# EAGLE board PCB v7 (EAGLE 9.7.0)
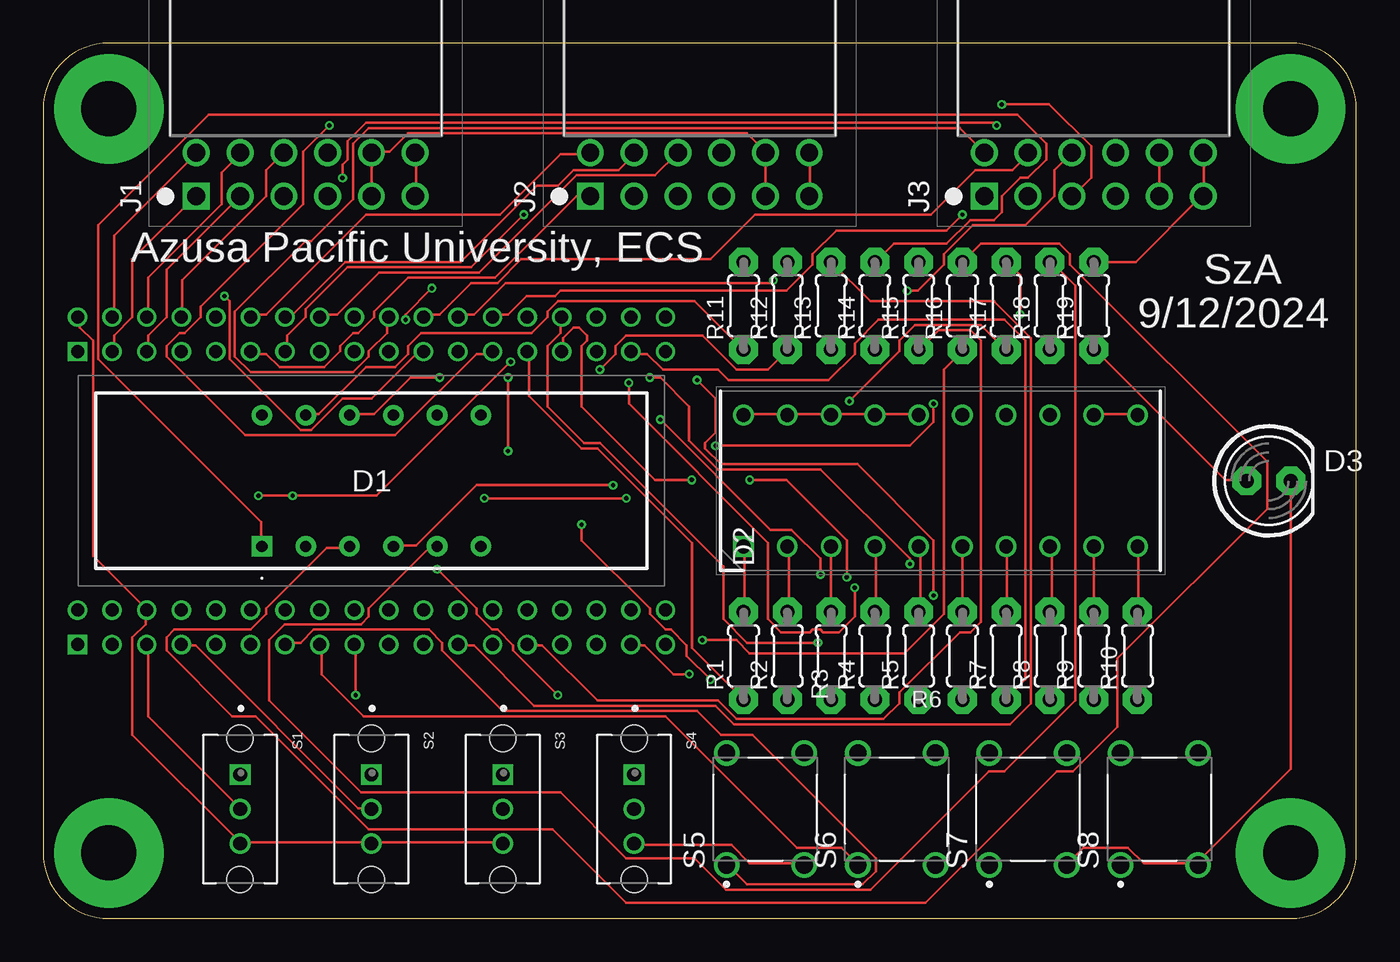
[diagram p0: board, top side]
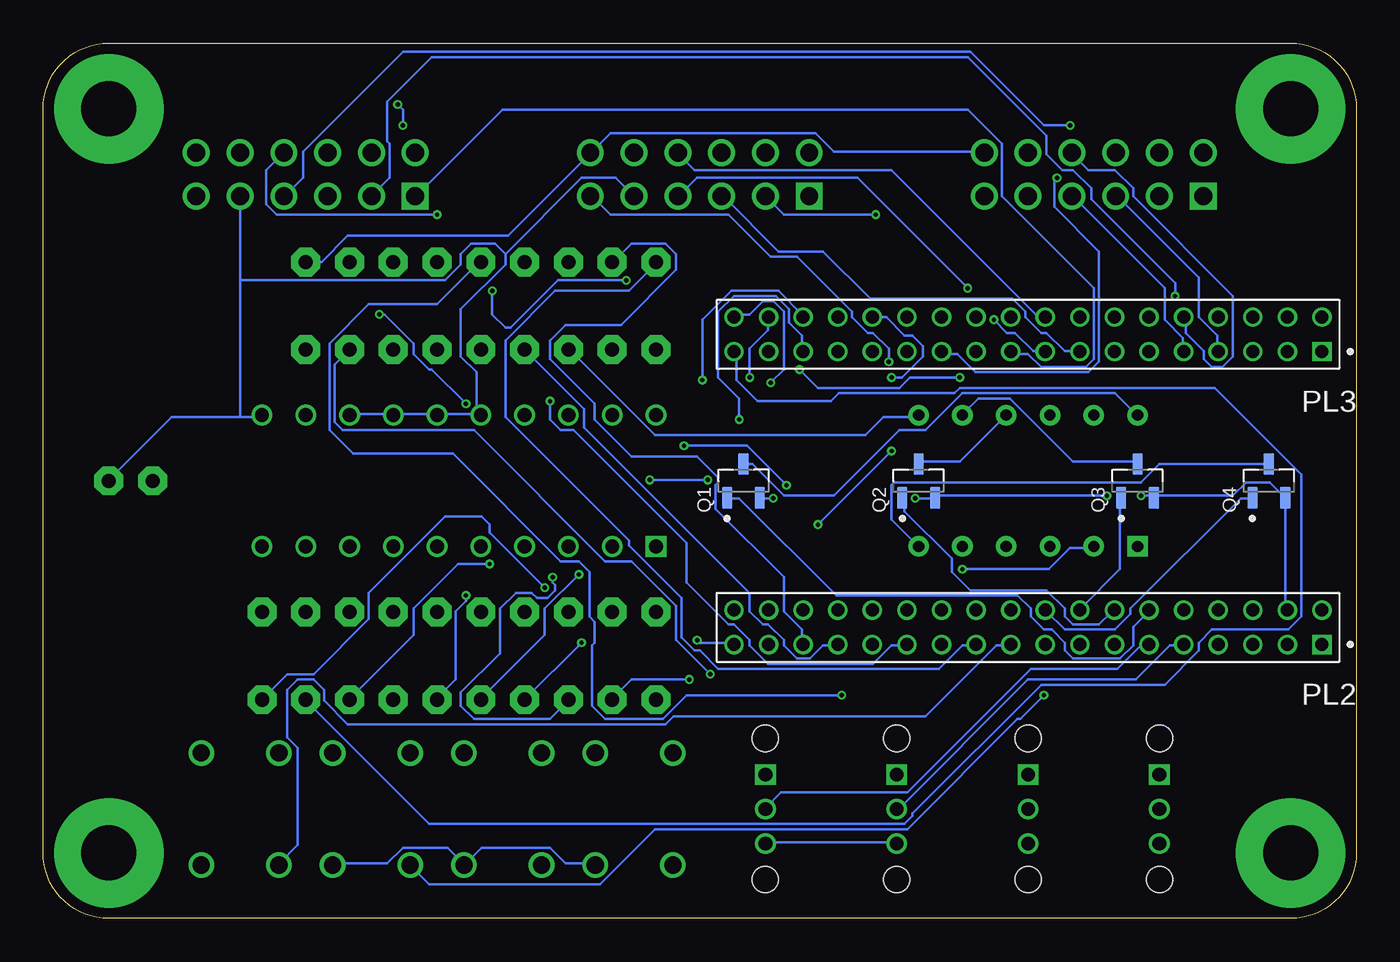
[diagram p1: board, bottom side, seen from below]

Size 76.2 x 50.8 mm. Coordinates in mm from the lower left corner, seen from the top.
Outline: 0,46.99 0,3.81 arc90 3.81,0 72.39,0 arc90 76.2,3.81 76.2,46.99 arc90 72.39,50.8 3.81,50.8 arc90 0,46.99
Copper layers (1*16): Top / Bottom
Stack-up Default Layer Stack: Top User Defined 0.035559375mm / Dielectric-1 User Defined 1.6mm / Bottom User Defined 0.035559375mm
Design rules: minimum drill size 10mil, minimum copper width 6mil, keepout clearance 0mil, drill distance 6mil, via restrict clearance 0mil, dimension clearance 15mil, restrict clearance 0mil, copper clearance wire_polygon to wire_polygon 6mil, copper clearance wire_polygon to pad_smd 6mil, copper clearance wire_polygon to via 6mil, copper clearance pad_smd to pad_smd 6mil, copper clearance pad_smd to via 6mil, copper clearance via to via 6mil, copper clearance smd to pad (same net) 6mil, copper clearance smd to via (same net) 6mil, copper clearance smd to smd (same net) 6mil

## Footprints (pad centres in the part's own frame; a part is rotated, then mirrored left to right if it is on the bottom)
LDQM282RI = drill 0.65 pad 1.192 square: 1 0,0 | drill 0.65 pad 1.192: 2 2.54,0; 3 5.08,0; 4 7.62,0; 5 10.16,0; 6 12.7,0; 7 12.7,7.62; 8 10.16,7.62; 9 7.62,7.62; 10 5.08,7.62; 11 2.54,7.62; 12 0,7.62
DIPS762W50P254L2527H825Q20N = drill 0.8 pad 1.2 square: 1 0,0 | drill 0.8 pad 1.2: 2 0,-2.54; 3 0,-5.08; 4 0,-7.62; 5 0,-10.16; 6 0,-12.7; 7 0,-15.24; 8 0,-17.78; 9 0,-20.32; 10 0,-22.86; 11 7.62,-22.86; 12 7.62,-20.32; 13 7.62,-17.78; 14 7.62,-15.24; 15 7.62,-12.7; 16 7.62,-10.16; 17 7.62,-7.62; 18 7.62,-5.08; 19 7.62,-2.54; 20 7.62,0
LED5MM = drill 0.813 pad 1.676 octagon: A -1.27,0; K 1.27,0
PMOD-SOCKET-FOR-HOST-BOARD = drill 1.04 pad 1.55 square: 1 0,0 | drill 1.04 pad 1.55: 2 2.54,0; 3 5.08,0; 4 7.62,0; 5 10.16,0; 6 12.7,0; 7 0,2.54; 8 2.54,2.54; 9 5.08,2.54; 10 7.62,2.54; 11 10.16,2.54; 12 12.7,2.54
MT_125_250 = drill 3.175 pad 6.35: 1 0,0
TE_4-1734506-1 = drill 0.75 pad 1.1 square: 1 0,0 | drill 0.75 pad 1.1: 2 0,-2; 3 2.007,0; 4 2.007,-2; 5 4.013,0; 6 4.013,-2; 7 6.02,0; 8 6.02,-2; 9 8.026,0; 10 8.026,-2; 11 10.033,0; 12 10.033,-2; 13 12.04,0; 14 12.04,-2; 15 14.046,0; 16 14.046,-2; 17 16.053,0; 18 16.053,-2; 19 18.059,0; 20 18.059,-2; 21 20.066,0; 22 20.066,-2; 23 22.073,0; 24 22.073,-2; 25 24.079,0; 26 24.079,-2; 27 26.086,0; 28 26.086,-2; 29 28.092,0; 30 28.092,-2; 31 30.099,0; 32 30.099,-2; 33 32.106,0; 34 32.106,-2; 35 34.112,0; 36 34.112,-2
SOT95P230X110-3N = smd 1.26 x 0.59: 1 -0.98,0.95; 2 -0.98,-0.95; 3 0.98,0
0204/5 = drill 0.813 pad 1.676 octagon: 1 -2.54,0; 2 2.54,0
SW_OS102011MS2QN1 = drill 0.8 square: 1 -2,0 | drill 0.8: 2 0,0; 3 2,0 | hole 1.5: -4.1,0; 4.1,0
SW_1825910-7 = drill 0.99: 1 -3.25,2.25; 2 3.25,2.25; 3 -3.25,-2.25; 4 3.25,-2.25

## Placement (x,y rotation side)
D1  [LDQM282RI]  12.7,21.59 0 top
D2  [DIPS762W50P254L2527H825Q20N]  40.64,21.59 90 top
D3  [LED5MM]  71.12,25.4 0 top
J1  [PMOD-SOCKET-FOR-HOST-BOARD]  8.89,41.91 0 top
J2  [PMOD-SOCKET-FOR-HOST-BOARD]  31.75,41.91 0 top
J3  [PMOD-SOCKET-FOR-HOST-BOARD]  54.61,41.91 0 top
MT1  [MT_125_250]  3.81,46.99 0 top
MT2  [MT_125_250]  3.81,3.81 0 top
MT3  [MT_125_250]  72.39,46.99 0 top
MT4  [MT_125_250]  72.39,3.81 0 top
PL2  [TE_4-1734506-1]  2,15.9 180 bottom
PL3  [TE_4-1734506-1]  2,32.9 180 bottom
Q1  [SOT95P230X110-3N]  35.56,25.4 90 bottom
Q2  [SOT95P230X110-3N]  25.4,25.4 90 bottom
Q3  [SOT95P230X110-3N]  12.7,25.4 90 bottom
Q4  [SOT95P230X110-3N]  5.08,25.4 90 bottom
R1  [0204/5]  40.64,15.24 90 top
R2  [0204/5]  43.18,15.24 90 top
R3  [0204/5]  45.72,15.24 90 top
R4  [0204/5]  48.26,15.24 90 top
R5  [0204/5]  50.8,15.24 90 top
R6  [0204/5]  53.34,15.24 90 top
R7  [0204/5]  55.88,15.24 90 top
R8  [0204/5]  58.42,15.24 90 top
R9  [0204/5]  60.96,15.24 90 top
R10  [0204/5]  63.5,15.24 90 top
R11  [0204/5]  40.64,35.56 90 top
R12  [0204/5]  43.18,35.56 90 top
R13  [0204/5]  45.72,35.56 90 top
R14  [0204/5]  48.26,35.56 90 top
R15  [0204/5]  50.8,35.56 90 top
R16  [0204/5]  53.34,35.56 90 top
R17  [0204/5]  55.88,35.56 90 top
R18  [0204/5]  58.42,35.56 90 top
R19  [0204/5]  60.96,35.56 90 top
S1  [SW_OS102011MS2QN1]  11.43,6.35 270 top
S2  [SW_OS102011MS2QN1]  19.05,6.35 270 top
S3  [SW_OS102011MS2QN1]  26.67,6.35 270 top
S4  [SW_OS102011MS2QN1]  34.29,6.35 270 top
S5  [SW_1825910-7]  41.91,6.35 90 top
S6  [SW_1825910-7]  49.53,6.35 90 top
S7  [SW_1825910-7]  57.15,6.35 90 top
S8  [SW_1825910-7]  64.77,6.35 90 top

## Library data of the parts
D1 = eagle-library-engr-240-f24; DESCRIPTION: LED Displays & Accessories LED Display; HEIGHT: 6.05mm; MANUFACTURER_NAME: Lumex; MANUFACTURER_PART_NUMBER: LDQ-M282RI; MOUSER_PART_NUMBER: 696-LDQ-M282RI; MOUSER_PRICE-STOCK: https://www.mouser.com/Search/Refine.aspx?Keyword=696-LDQ-M282RI
D2 = eagle-library-engr-240-f24; DESCRIPTION: LED Uni-Color Green 565nm 20-Pin PDIP; HEIGHT: 8.25mm; MANUFACTURER_NAME: Lite-On; MANUFACTURER_PART_NUMBER: LTA-1000G; MOUSER_PART_NUMBER: 859-LTA-1000G; MOUSER_PRICE-STOCK: https://www.mouser.co.uk/ProductDetail/Lite-On/LTA-1000G?qs=%2FTKcI5XXRKq0QINzVmwJHg%3D%3D
D3 J1-J3 MT1-MT4 PL2 PL3 R1-R19 = eagle-library-engr-240-f24
Q1-Q4 = eagle-library-engr-240-f24; MANUFACTURER: Nexperia; MAXIMUM_PACKAGE_HEIGHT: 1.10 mm; PARTREV: 1; SNAPEDA_PN: NX2301P; STANDARD: IPC 7351B
S1-S4 = eagle-library-engr-240-f24; MANUFACTURER: C&K; STANDARD: MANUFACTURER RECOMMENDATIONS
S5-S8 = eagle-library-engr-240-f24; MANUFACTURER: TE Connectivity; PARTREV: C10; STANDARD: Manufacturer Recommendation

## Nets
3.3V: J1.6 J1.12 J2.6 J2.12 J3.6 J3.12 PL2.4 Q1.2 Q2.2 Q3.2 Q4.2 R19.2
BAR_1: PL3.27 R1.1
BAR_2: PL3.28 R2.1
BAR_3: PL3.29 R3.1
BAR_4: PL3.30 R4.1
BAR_5: PL3.31 R5.1
BAR_6: PL3.32 R6.1
BAR_7: PL3.33 R7.1
BAR_8: PL3.34 R8.1
BAR_9: PL3.35 R9.1
BAR_10: PL3.36 R10.1
BUTTON_1: PL2.13 S5.1
BUTTON_2: PL2.15 S6.1
BUTTON_3: PL2.17 S7.1
BUTTON_4: PL2.19 S8.1
DIGIT_1: PL2.12 Q1.1
DIGIT_1_A: D1.12 Q1.3
DIGIT_2: PL2.14 Q2.1
DIGIT_2_A: D1.9 Q2.3
DIGIT_3: PL2.16 Q3.1
DIGIT_3_A: D1.8 Q3.3
DIGIT_4: PL2.18 Q4.1
DIGIT_4_A: D1.6 Q4.3
GND: D2.11 D2.12 D2.13 D2.14 D2.15 D2.16 D2.17 D2.18 D2.19 D2.20 D3.K J1.5 J1.11 J2.5 J2.11 J3.5 J3.11 PL2.6 PL3.2 S1.3 S2.3 S3.3 S4.3 S5.3 S6.3 S7.3 S8.3
N$2: D1.1 R14.2
N$3: D1.2 R15.2
N$4: D1.3 R16.2
N$5: D1.4 R17.2
N$6: D1.5 R18.2
N$7: D2.1 R1.2
N$8: D2.2 R2.2
N$9: D2.3 R3.2
N$10: D2.4 R4.2
N$11: D2.5 R5.2
N$12: D2.6 R6.2
N$13: D2.7 R7.2
N$14: D2.8 R8.2
N$15: D2.9 R9.2
N$16: D2.10 R10.2
N$17: D3.A R19.1
N$52: D1.11 R11.1
N$53: D1.10 R12.1
N$54: D1.7 R13.1
PMOD_1_1: J1.1 PL3.3
PMOD_1_2: J1.2 PL3.5
PMOD_1_3: J1.3 PL3.7
PMOD_1_4: J1.4 PL3.9
PMOD_1_5: J1.7 PL3.4
PMOD_1_6: J1.8 PL3.6
PMOD_1_7: J1.9 PL3.8
PMOD_1_8: J1.10 PL3.10
PMOD_2_1: J2.1 PL3.11
PMOD_2_2: J2.2 PL3.13
PMOD_2_3: J2.3 PL3.15
PMOD_2_4: J2.4 PL3.17
PMOD_2_5: J2.7 PL3.12
PMOD_2_6: J2.8 PL3.14
PMOD_2_7: J2.9 PL3.16
PMOD_2_8: J2.10 PL3.18
PMOD_3_1: J3.1 PL3.19
PMOD_3_2: J3.2 PL3.21
PMOD_3_3: J3.3 PL3.23
PMOD_3_4: J3.4 PL3.25
PMOD_3_5: J3.7 PL3.20
PMOD_3_6: J3.8 PL3.22
PMOD_3_7: J3.9 PL3.24
PMOD_3_8: J3.10 PL3.26
SEGMENT_A: PL2.21 R11.2
SEGMENT_B: PL2.23 R13.2
SEGMENT_C: PL2.25 R17.1
SEGMENT_D: PL2.27 R15.1
SEGMENT_DP: PL2.35 R16.1
SEGMENT_E: PL2.29 R14.1
SEGMENT_F: PL2.31 R12.2
SEGMENT_G: PL2.33 R18.1
SWITCH_1: PL2.5 S1.2
SWITCH_2: PL2.7 S2.2
SWITCH_3: PL2.9 S3.2
SWITCH_4: PL2.11 S4.2

## Tracks (layer width: path | path; a pad name or v marks a point on that pad's centre or on a via)
3.3V  (via drill 0.25)
  Top 0.152: v33.83,24.38 v25.6,24.38 | v12.5,24.54 v14.48,24.54 19.36,24.54 v27.13,32.31 | J3.12 67.36,44.35 67.36,41.91 J3.6 67.21,41.91 63.4,38.1 R19.2 | J1.6 21.64,41.91 21.64,44.35 J1.12 | J2.6 44.5,41.91 44.5,44.35 J2.12
  Bottom 0.152: v25.6,24.38 24.54,24.38 Q2.2 24.38,24.54 v14.48,24.54 | v33.83,24.38 34.59,24.38 Q1.2 | PL2.4 4.12,17.98 4.12,24.38 Q4.2 4.27,24.54 5.03,25.3 6.4,25.3 7.16,24.54 11.73,24.54 Q3.2 11.89,24.54 v12.5,24.54 | J1.12 21.64,44.5 30.33,44.5 31.39,45.57 43.28,45.57 44.35,44.5 J2.12 44.5,44.35 49.23,39.62 58.52,39.62 60.05,38.1 R19.2 | v27.13,32.31 27.13,33.07 28.04,33.98 28.35,33.98 29.26,34.9 29.26,35.2 32.46,38.41 33.98,38.41 36.42,40.84 43.28,40.84 44.35,41.91 J2.6
BAR_1
  Top 0.152: R1.1 37.64,15.7 37.64,21.79 32.16,27.28 31.24,27.28 28.19,30.33 28.19,32.77 PL3.27
BAR_2  (via drill 0.25)
  Top 0.152: v26.98,27.13 v26.98,31.39 | v31.24,22.86 31.24,21.95 35.2,17.98 35.2,17.68 36.12,16.76 36.42,16.76 37.34,15.85 37.34,15.24 v38.71,13.87
  Bottom 0.152: v26.98,31.39 26.36,31.39 25.15,32.61 25.15,33.22 25.76,33.83 26.21,33.83 27.28,34.9 28.04,34.9 PL3.28 | v31.24,22.86 v26.98,27.13 | v38.71,13.87 42.06,13.87 43.13,12.8 R2.1
BAR_3  (via drill 0.25)
  Top 0.152: v37.64,25.45 35.51,25.45 31.24,29.72 31.24,33.22 31.55,33.53 31.55,33.83 31.09,34.29 30.79,34.29 30.18,33.68 30.18,32.92 PL3.29 | v41,25.45 43.13,25.45 46.63,21.95 v46.63,19.81
  Bottom 0.152: v41,25.45 v37.64,25.45 | v46.63,19.81 46.63,19.51 46.48,19.36 46.48,19.05 46.94,18.59 47.55,18.59 47.85,18.9 48.77,18.9 49.68,17.98 49.68,15.39 51.97,13.11 51.97,12.34 51.21,11.58 46.79,11.58 45.72,12.65 R3.1
BAR_4  (via drill 0.25)
  Top 0.152: v44.96,16 40.84,16 39.47,17.37 39.47,20.42 32.31,27.58 31.39,27.58 29.26,29.72 29.26,33.22 30.02,33.98 30.02,34.9 PL3.30
  Bottom 0.152: R4.1 v44.96,16
BAR_5  (via drill 0.25)
  Top 0.152: v35.81,28.96 42.22,22.55 43.43,22.55 45.11,20.88 v45.11,19.96
  Bottom 0.152: v35.81,28.96 35.81,30.18 37.03,31.39 37.03,35.2 36.12,36.12 33.68,36.12 32.92,35.36 32.92,34.59 32.16,33.83 32.16,32.92 PL3.31 | v45.11,19.96 47.09,17.98 47.09,16.46 50.75,12.8 R5.1
BAR_6  (via drill 0.25)
  Top 0.152: v37.95,31.24 39.01,30.18 39.01,28.19 38.41,27.58 38.41,27.28 39.32,26.36 47.24,26.36 51.66,21.95 v51.66,18.75
  Bottom 0.152: v37.95,31.24 37.95,34.75 36.27,36.42 33.53,36.42 32.16,35.05 PL3.32 | v51.66,18.75 51.66,18.44 52.27,17.83 52.27,13.87 53.34,12.8 R6.1
BAR_7
  Top 0.152: PL3.33 34.14,32.77 35.05,32.77 35.97,31.85 39.17,31.85 39.78,31.24 45.57,31.24 47.09,32.77 47.09,33.38 48.46,34.75 55.78,34.75 57,33.53 57,13.87 55.93,12.8 R7.1
BAR_8  (via drill 0.25)
  Top 0.152: v35.2,31.39 35.81,31.39 37.49,29.72 37.49,27.74 39.17,26.06 45.11,26.06 50.29,20.88 v50.29,20.57
  Bottom 0.152: v35.2,31.39 35.2,33.07 34.14,34.14 34.14,34.9 PL3.34 | v50.29,20.57 52.12,20.57 54.71,17.98 54.71,16.46 58.37,12.8 R8.1
BAR_9
  Bottom 0.152: PL3.35 35.97,32.77 35.97,31.24 34.75,30.02 30.48,30.02 30.02,30.48 23.32,30.48 23.01,30.79 8.23,30.79 3.2,25.76 3.2,17.53 3.96,16.76 8.38,16.76 9.14,16 9.14,15.54 11.12,13.56 18.29,13.56 25.76,6.1 25.76,5.94 26.21,5.49 53.8,5.49 60.96,12.65 R9.1
BAR_10  (via drill 0.25)
  Top 0.152: v33.98,31.09 33.98,29.87 42.06,21.79 42.06,17.37 42.82,16.61 44.5,16.61 44.65,16.76 45.11,16.76 45.26,16.61 46.18,16.61 47.09,17.53 v47.09,19.2
  Bottom 0.152: v33.98,31.09 33.22,31.85 33.22,35.2 33.83,35.81 34.44,35.81 35.2,35.05 35.97,35.05 PL3.36 | v47.09,19.2 50.29,22.4 50.29,22.86 50.75,23.32 52.88,23.32 57.3,18.9 57.3,17.37 60.5,14.17 62.03,14.17 R10.1
BUTTON_1
  Top 0.152: PL2.13 14.17,16 14.94,16 15.7,16.76 22.4,16.76 23.16,16 23.16,15.54 26.67,12.04 37.95,12.04 39.32,10.67 41.15,10.67 48.31,3.5 48.31,2.74 47.55,1.98 40.84,1.98 39.78,3.05 S5.1
BUTTON_2
  Top 0.152: PL2.15 16.15,15.85 16.15,14.17 18.59,11.73 36.12,11.73 43.74,4.12 46.33,4.12 47.24,3.2 S6.1
BUTTON_3  (via drill 0.25)
  Top 0.152: v18.14,12.95 18.14,15.85 PL2.17
  Bottom 0.152: v18.14,12.95 19.51,11.58 19.66,11.58 26.06,5.18 40.69,5.18 43.89,1.98 53.8,1.98 54.86,3.05 S7.1
BUTTON_4
  Bottom 0.152: PL2.19 20.12,15.85 20.88,15.85 24.99,11.73 39.62,11.73 40.08,11.28 58.52,11.28 59.89,12.65 59.89,13.26 60.5,13.87 61.42,13.87 62.03,13.26 62.03,10.52 61.42,9.91 61.42,4.27 62.48,3.2 S8.1
DIGIT_1
  Bottom 0.152: Q1.1 36.42,24.38 35.81,24.38 30.18,18.75 19.66,18.75 18.9,17.98 18.9,17.53 18.14,16.76 17.68,16.76 16.92,16 16.92,15.54 16.46,15.09 13.72,15.09 12.95,15.85 12.95,16.92 12.04,17.83 PL2.12
DIGIT_1_A
  Bottom 0.152: Q1.3 35.51,26.36 35.05,26.36 33.22,24.54 30.33,24.54 26.52,28.35 24.99,28.35 22.86,30.48 14.02,30.48 12.8,29.26 D1.12
DIGIT_2
  Bottom 0.152: Q2.1 26.21,24.38 26.21,23.62 23.47,20.88 23.47,20.12 22.4,19.05 17.98,19.05 16.92,17.98 16.92,17.53 16.46,17.07 14.94,17.07 14.17,17.83 PL2.14
DIGIT_2_A
  Bottom 0.152: D1.9 23.01,26.52 25.3,26.52 Q2.3
DIGIT_3
  Bottom 0.152: Q3.1 13.72,24.38 13.72,20.27 16,17.98 PL2.16
DIGIT_3_A
  Bottom 0.152: Q3.3 12.8,26.52 16.46,26.52 20.12,30.18 21.95,30.18 22.86,29.26 D1.8
DIGIT_4
  Bottom 0.152: Q4.1 6.1,24.38 6.71,24.38 13.11,17.98 13.11,17.68 14.02,16.76 16.92,16.76 17.98,17.83 PL2.18
DIGIT_4_A
  Bottom 0.152: D1.6 26.98,23.16 26.98,25.15 26.82,25.3 12.5,25.3 11.43,26.36 5.18,26.36 Q4.3
GND
  Top 0.152: J3.11 J3.5 | D2.12 60.96,29.26 63.4,29.26 D2.11 | D2.20 40.69,29.26 43.13,29.26 D2.19 43.28,29.26 45.72,29.26 | D2.16 50.75,29.26 48.31,29.26 D2.17 48.16,29.26 45.72,29.26 | 45.72,29.26 D2.18 | J1.5 J1.11 19.05,44.5 20.12,44.5 21.18,45.57 40.84,45.57 41.91,44.5 J2.11 J2.5 | 66.9,3.2 63.86,3.2 62.94,4.12 60.35,4.12 59.44,3.2 S7.3 | 11.43,4.42 5.18,10.67 5.18,16.31 5.94,17.07 5.94,17.83 PL2.6 5.94,17.98 2.9,21.03 2.9,33.53 2.13,34.29 2.13,34.9 PL3.2 | 11.43,4.42 19.05,4.42 | 11.43,4.42 S1.3 | 19.05,4.42 26.67,4.42 S3.3 | 19.05,4.42 S2.3 | S5.3 44.04,3.2 41,3.2 39.93,4.27 34.29,4.27 S4.3 | D3.K 72.39,8.69 66.9,3.2 | 66.9,3.2 S8.3
  Bottom 0.152: 64.77,29.11 68.73,29.11 72.39,25.45 D3.K | 64.77,29.11 63.55,29.11 D2.11 | 64.77,29.11 64.77,37.03 | 64.77,37.03 J3.5 | D2.13 58.37,29.26 55.93,29.26 D2.14 55.78,29.26 53.34,29.26 | 51.05,29.26 50.9,29.26 D2.16 51.05,29.26 | 51.05,29.26 53.34,29.26 | 53.34,29.26 D2.15 | 51.05,29.26 51.05,31.7 51.97,32.61 51.97,35.36 49.38,37.95 49.38,38.56 | 49.38,38.56 44.96,42.98 42.98,42.98 J2.5 | 64.77,37.03 52.88,37.03 51.97,37.95 51.97,38.56 51.36,39.17 49.99,39.17 49.38,38.56 | S5.3 44.2,3.2 45.87,3.2 46.79,4.12 50.75,4.12 51.66,3.2 S6.3 51.82,3.2 52.73,4.12 55.32,4.12 56.24,3.2 59.28,3.2 S7.3 | S4.3 34.29,4.42 26.67,4.42 S3.3
N$2
  Top 0.152: D1.1 12.65,21.64 12.65,23.01 3.2,32.46 3.2,40.23 9.6,46.63 56.54,46.63 58.22,44.96 58.22,44.04 57.15,42.98 56.69,42.98 55.63,41.91 55.63,41 55.17,40.54 53.8,40.54 52.43,39.17 49.38,39.17 48.31,38.1 R14.2
N$3  (via drill 0.25)
  Top 0.152: v22.86,20.27 25.15,17.98 25.15,17.68 26.06,16.76 26.36,16.76 27.28,15.85 27.28,15.54 v29.87,12.95
  Bottom 0.152: v22.86,20.27 17.83,20.27 16.61,21.49 15.24,21.49 D1.2 | v29.87,12.95 38.86,12.95 40.23,11.58 43.59,11.58 44.35,12.34 44.35,15.85 44.2,16 44.2,17.22 44.5,17.53 44.5,20.12 45.11,20.73 46.18,20.73 52.43,26.98 58.22,26.98 59.59,28.35 59.59,33.38 57.3,35.66 53.34,35.66 50.9,38.1 R15.2
N$4
  Top 0.152: R16.2 54.41,39.17 58.98,39.17 59.59,38.56 59.59,37.95 71.02,26.52 71.02,23.77 62.33,15.09 62.33,11.12 59.74,8.53 58.83,8.53 51.21,0.91 33.83,0.91 29.57,5.18 18.9,5.18 12.34,11.73 10.97,11.73 7.16,15.54 7.16,16.31 7.62,16.76 12.04,16.76 12.95,17.68 12.95,17.98 16.46,21.49 17.68,21.49 D1.3
N$5  (via drill 0.25)
  Top 0.152: v33.07,25.15 25.15,25.15 21.64,21.64 20.42,21.64 D1.4 | v39.01,27.43 50.29,27.43 51.66,28.8 v51.66,29.87 | v56.69,35.05 56.69,37.34 55.93,38.1 R17.2
  Bottom 0.152: v33.07,25.15 35.36,27.43 v39.01,27.43 | v51.66,29.87 53.65,31.85 53.8,31.85 54.71,32.77 54.71,33.38 56.39,35.05 v56.69,35.05
N$6
  Top 0.152: D1.5 22.86,21.49 22.4,21.49 18.9,17.98 18.9,17.53 18.44,17.07 14.02,17.07 13.11,16.15 13.11,12.65 18.44,7.32 30.02,7.32 33.83,3.5 37.8,3.5 39.62,1.68 48.01,1.68 54.86,8.53 55.78,8.53 59.89,12.65 59.89,36.73 58.52,38.1 R18.2
N$7
  Top 0.152: D2.1 40.69,21.49 40.69,17.83 R1.2
N$8
  Top 0.152: D2.2 43.28,21.49 43.28,17.83 R2.2
N$9
  Top 0.152: R3.2 D2.3
N$10
  Top 0.152: D2.4 48.31,21.49 48.31,17.83 R4.2
N$11
  Top 0.152: D2.5 50.9,21.49 50.9,17.83 R5.2
N$12
  Top 0.152: R6.2 D2.6
N$13
  Top 0.152: D2.7 55.93,21.49 55.93,17.83 R7.2
N$14
  Top 0.152: D2.8 58.52,21.49 58.52,17.83 R8.2
N$15
  Top 0.152: R9.2 D2.9
N$16
  Top 0.152: D2.10 63.55,21.49 63.55,17.83 R10.2
N$17
  Top 0.152: D3.A 69.8,25.45 68.58,25.45 60.96,33.07 R19.1
N$52
  Top 0.152: D1.11 15.24,29.26 16,29.26 18.75,32 20.42,32 21.18,32.77 21.18,33.22 21.95,33.98 28.35,33.98 29.26,34.9 29.26,35.2 29.87,35.81 37.8,35.81 40.54,33.07 R11.1
N$53  (via drill 0.25)
  Top 0.152: v23.01,31.39 21.34,31.39 19.2,29.26 17.83,29.26 D1.10 | v32.31,31.85 33.22,32.77 33.22,33.22 33.83,33.83 38.25,33.83 40.23,31.85 42.06,31.85 43.13,32.92 R12.1
  Bottom 0.152: v23.01,31.39 25.91,31.39 26.52,30.79 31.24,30.79 v32.31,31.85
N$54
  Bottom 0.152: D1.7 25.45,29.11 27.43,29.11 28.5,28.04 40.69,28.04 45.72,33.07 R13.1
PMOD_1_1
  Top 0.152: PL3.3 4.12,32.92 4.12,33.83 5.18,34.9 5.18,38.25 8.84,41.91 J1.1
PMOD_1_2
  Top 0.152: J1.2 7.16,37.64 7.16,34.9 6.1,33.83 6.1,32.92 PL3.5
PMOD_1_3
  Bottom 0.152: PL3.7 8.08,32.92 8.08,33.83 9.14,34.9 9.14,37.19 13.87,41.91 J1.3
PMOD_1_4
  Bottom 0.152: PL3.9 10.06,32.92 10.06,33.68 11.12,34.75 11.12,36.58 16.46,41.91 J1.4
PMOD_1_5
  Top 0.152: PL3.4 4.12,35.05 4.12,39.62 8.84,44.35 J1.7
PMOD_1_6
  Top 0.152: PL3.6 6.1,35.05 6.1,37.19 10.36,41.45 10.36,43.28 11.43,44.35 J1.8
PMOD_1_7
  Top 0.152: J1.9 12.95,43.43 12.95,41.91 8.08,37.03 8.08,35.05 PL3.8
PMOD_1_8
  Bottom 0.152: PL3.10 9.91,34.9 9.91,33.98 8.84,32.92 8.84,32.46 8.38,32 7.77,32 7.16,32.61 7.16,36.12 12.95,41.91 12.95,42.37 14.02,43.43 15.54,43.43 16.46,44.35 J1.10
PMOD_2_1
  Top 0.152: J2.1 30.94,41.91 26.21,37.19 21.18,37.19 19.2,35.2 19.2,34.9 18.29,33.98 17.98,33.98 17.22,33.22 17.22,32.92 16.31,32 13.72,32 12.95,32.77 12.04,32.77 PL3.11
PMOD_2_2  (via drill 0.25)
  Top 0.152: v27.89,40.84 24.84,37.8 17.68,37.8 15.24,35.36 15.24,34.9 14.17,33.83 14.17,32.92 PL3.13
  Bottom 0.152: v27.89,40.84 33.22,40.84 J2.2
PMOD_2_3
  Bottom 0.152: PL3.15 16.15,32.92 16.92,32.92 17.98,33.98 18.29,33.98 19.2,34.9 19.2,35.2 19.96,35.97 28.19,35.97 30.94,38.71 33.53,38.71 36.73,41.91 J2.3
PMOD_2_4  (via drill 0.25)
  Top 0.152: v21.03,34.75 21.03,35.05 v22.55,36.58
  Bottom 0.152: v21.03,34.75 20.27,33.98 19.81,33.98 18.75,32.92 18.14,32.92 PL3.17 | v22.55,36.58 28.96,42.98 38.25,42.98 39.32,41.91 J2.4
PMOD_2_5
  Top 0.152: PL3.12 12.04,35.05 12.95,35.05 18.75,40.84 26.52,40.84 30.02,44.35 31.7,44.35 J2.7
PMOD_2_6
  Top 0.152: PL3.14 14.17,35.05 14.48,35.05 17.53,38.1 24.23,38.1 28.65,42.52 29.87,42.52 30.79,43.43 33.38,43.43 34.29,44.35 J2.8
PMOD_2_7
  Top 0.152: J2.9 35.51,43.13 30.94,43.13 25.3,37.49 19.51,37.49 17.07,35.05 16.15,35.05 PL3.16
PMOD_2_8
  Bottom 0.152: PL3.18 18.14,35.05 18.59,35.05 26.98,43.43 38.41,43.43 39.32,44.35 J2.10
PMOD_3_1
  Bottom 0.152: PL3.19 19.96,32.77 19.05,32.77 18.29,32 15.7,32 15.24,32.46 15.24,36.58 20.57,41.91 20.57,44.96 22.55,46.94 49.53,46.94 54.56,41.91 J3.1
PMOD_3_2  (via drill 0.25)
  Top 0.152: v10.52,36.12 10.82,35.81 10.82,32.46 14.94,28.35 15.54,28.35 17.37,30.18 19.05,30.18 21.64,32.77 21.95,32.77 PL3.21
  Bottom 0.152: v10.52,36.12 10.52,36.88 15.39,41.76 15.39,42.37 16.46,43.43 17.07,43.43 17.98,44.35 17.98,45.41 22.55,49.99 53.65,49.99 56.24,47.4 56.24,45.11 56.08,44.96 56.08,42.98 J3.2
PMOD_3_3  (via drill 0.25)
  Top 0.152: v17.37,42.98 17.37,43.74 17.68,44.04 17.68,45.11 18.75,46.18 55.17,46.18 v55.32,46.02 | v55.63,47.24 58.37,47.24 60.81,44.81 60.81,42.98 59.74,41.91 J3.3
  Bottom 0.152: v17.37,42.98 17.53,42.82 17.53,41.3 14.94,38.71 14.94,32.31 15.54,31.7 22.1,31.7 23.16,32.77 23.93,32.77 PL3.23 | v55.32,46.02 55.32,46.94 v55.63,47.24
PMOD_3_4  (via drill 0.25)
  Top 0.152: v16.61,46.02 15.09,44.5 15.09,41.45 9.14,35.51 9.14,34.9 8.23,33.98 7.92,33.98 7.16,33.22 7.16,32.61 11.73,28.04 20.42,28.04 25.15,32.77 26.06,32.77 PL3.25
  Bottom 0.152: v16.61,46.02 18.14,46.02 22.4,50.29 55.32,50.29 61.11,44.5 61.11,42.98 62.18,41.91 J3.4
PMOD_3_5
  Top 0.152: J3.7 53.19,45.87 18.9,45.87 17.98,44.96 17.98,41.76 15.54,39.32 15.24,39.32 11.12,35.2 11.12,32.61 12.04,31.7 17.98,31.7 18.9,32.61 18.9,32.92 19.96,33.98 19.96,34.9 PL3.20
PMOD_3_6
  Top 0.152: PL3.22 22.1,35.05 23.01,35.05 24.84,36.88 26.36,36.88 27.74,38.25 38.71,38.25 41.3,40.84 51.51,40.84 54.1,43.43 56.24,43.43 57.15,44.35 J3.8
PMOD_3_7  (via drill 0.25)
  Top 0.152: v42.37,37.03 42.22,36.88 26.82,36.88 24.99,35.05 24.08,35.05 PL3.24 | v50.14,36.42 50.75,36.42 52.27,37.95 52.27,38.56 53.95,40.23 57,40.23 58.67,41.91 58.67,43.43 J3.9
  Bottom 0.152: v42.37,37.03 46.33,37.03 49.07,34.29 49.38,34.29 50.14,35.05 v50.14,36.42
PMOD_3_8  (via drill 0.25)
  Top 0.152: v53.34,40.84 52.43,39.93 46.02,39.93 44.65,38.56 44.65,37.95 43.13,36.42 30.02,36.42 29.72,36.12 28.04,36.12 26.98,35.05 26.21,35.05 PL3.26
  Bottom 0.152: v53.34,40.84 62.64,40.84 63.25,41.45 63.25,43.43 J3.10
SEGMENT_A
  Bottom 0.152: PL2.21 22.1,15.85 22.86,15.85 24.23,14.48 37.03,14.48 38.1,15.54 38.41,15.54 39.17,16.31 39.17,18.59 42.22,21.64 42.22,21.95 49.38,29.11 49.38,33.53 46.48,36.42 42.22,36.42 40.54,38.1 R11.2
SEGMENT_B
  Top 0.152: R13.2 48.01,35.81 55.17,35.81 57.3,33.68 57.3,12.5 56.08,11.28 40.08,11.28 39.01,12.34 28.5,12.34 24.99,15.85 24.08,15.85 PL2.23
SEGMENT_C  (via drill 0.25)
  Top 0.152: v46.79,30.02 49.68,32.92 49.68,33.53 50.6,34.44 54.41,34.44 55.78,33.07 R17.1
  Bottom 0.152: v46.79,30.02 46.79,28.96 46.18,28.35 45.41,28.35 38.86,21.79 38.86,19.51 36.42,17.07 36.12,17.07 35.2,16.15 35.2,15.85 34.14,14.78 28.04,14.78 26.98,15.85 26.21,15.85 PL2.25
SEGMENT_D
  Top 0.152: PL2.27 28.19,15.85 28.96,15.85 32.16,12.65 39.17,12.65 40.23,11.58 48.77,11.58 49.68,12.5 49.68,13.11 53.19,16.61 53.8,16.61 54.41,17.22 54.41,33.53 53.8,34.14 51.97,34.14 50.9,33.07 R15.1
SEGMENT_DP  (via drill 0.25)
  Top 0.152: v38.25,16.15 40.23,16.15 41,15.39 49.99,15.39 52.27,17.68 52.27,31.85 53.34,32.92 R16.1
  Bottom 0.152: v38.25,16.15 38.1,16 36.12,16 PL2.35
SEGMENT_E
  Bottom 0.152: R14.1 44.81,29.57 44.81,28.5 35.2,18.9 35.2,17.83 34.44,17.07 34.14,17.07 33.22,16.15 33.22,15.85 32.46,15.09 31.7,15.09 30.94,15.85 30.18,15.85 PL2.29
SEGMENT_F
  Bottom 0.152: PL2.31 32.16,16 32.16,16.76 33.22,17.83 33.22,19.81 37.19,23.77 37.19,25.15 37.03,25.3 37.03,25.6 38.25,26.82 42.06,26.82 44.2,28.96 44.2,29.87 46.79,32.46 46.79,33.53 45.87,34.44 42.67,34.44 39.47,37.64 39.47,38.56 40.08,39.17 42.06,39.17 43.13,38.1 R12.2
SEGMENT_G  (via drill 0.25)
  Top 0.152: v37.49,14.17 36.58,14.17 34.9,15.85 34.14,15.85 PL2.33
  Bottom 0.152: v37.49,14.17 39.47,16.15 39.47,18.14 42.06,20.73 43.59,20.73 51.21,28.35 58.83,28.35 59.28,28.8 59.28,32.16 R18.1
SWITCH_1
  Top 0.152: PL2.5 6.1,15.85 6.1,11.73 11.43,6.4 S1.2
SWITCH_2
  Top 0.152: PL2.7 8.08,15.85 8.84,15.85 18.29,6.4 19.05,6.4 S2.2
SWITCH_3
  Bottom 0.152: PL2.9 10.06,15.85 10.82,15.85 12.8,13.87 19.05,13.87 26.67,6.25 S3.2
SWITCH_4
  Bottom 0.152: PL2.11 12.04,15.85 12.5,15.85 13.87,14.48 18.9,14.48 26.06,7.32 33.38,7.32 34.29,6.4 S4.2

## Text on the board
SilkscreenTop: Azusa Pacific University, ECS | SzA | 9/12/2024